# Altium PCB AlarmTiming.PcbDoc
Units mm, origin at the board's own origin, x right, y up, seen from the top; angles counter-clockwise.
Board outline 103.5 x 82.17 mm, 2 copper layers (Top Layer, Bottom Layer); 34 components, 27 nets, 119 pads, 3 vias.
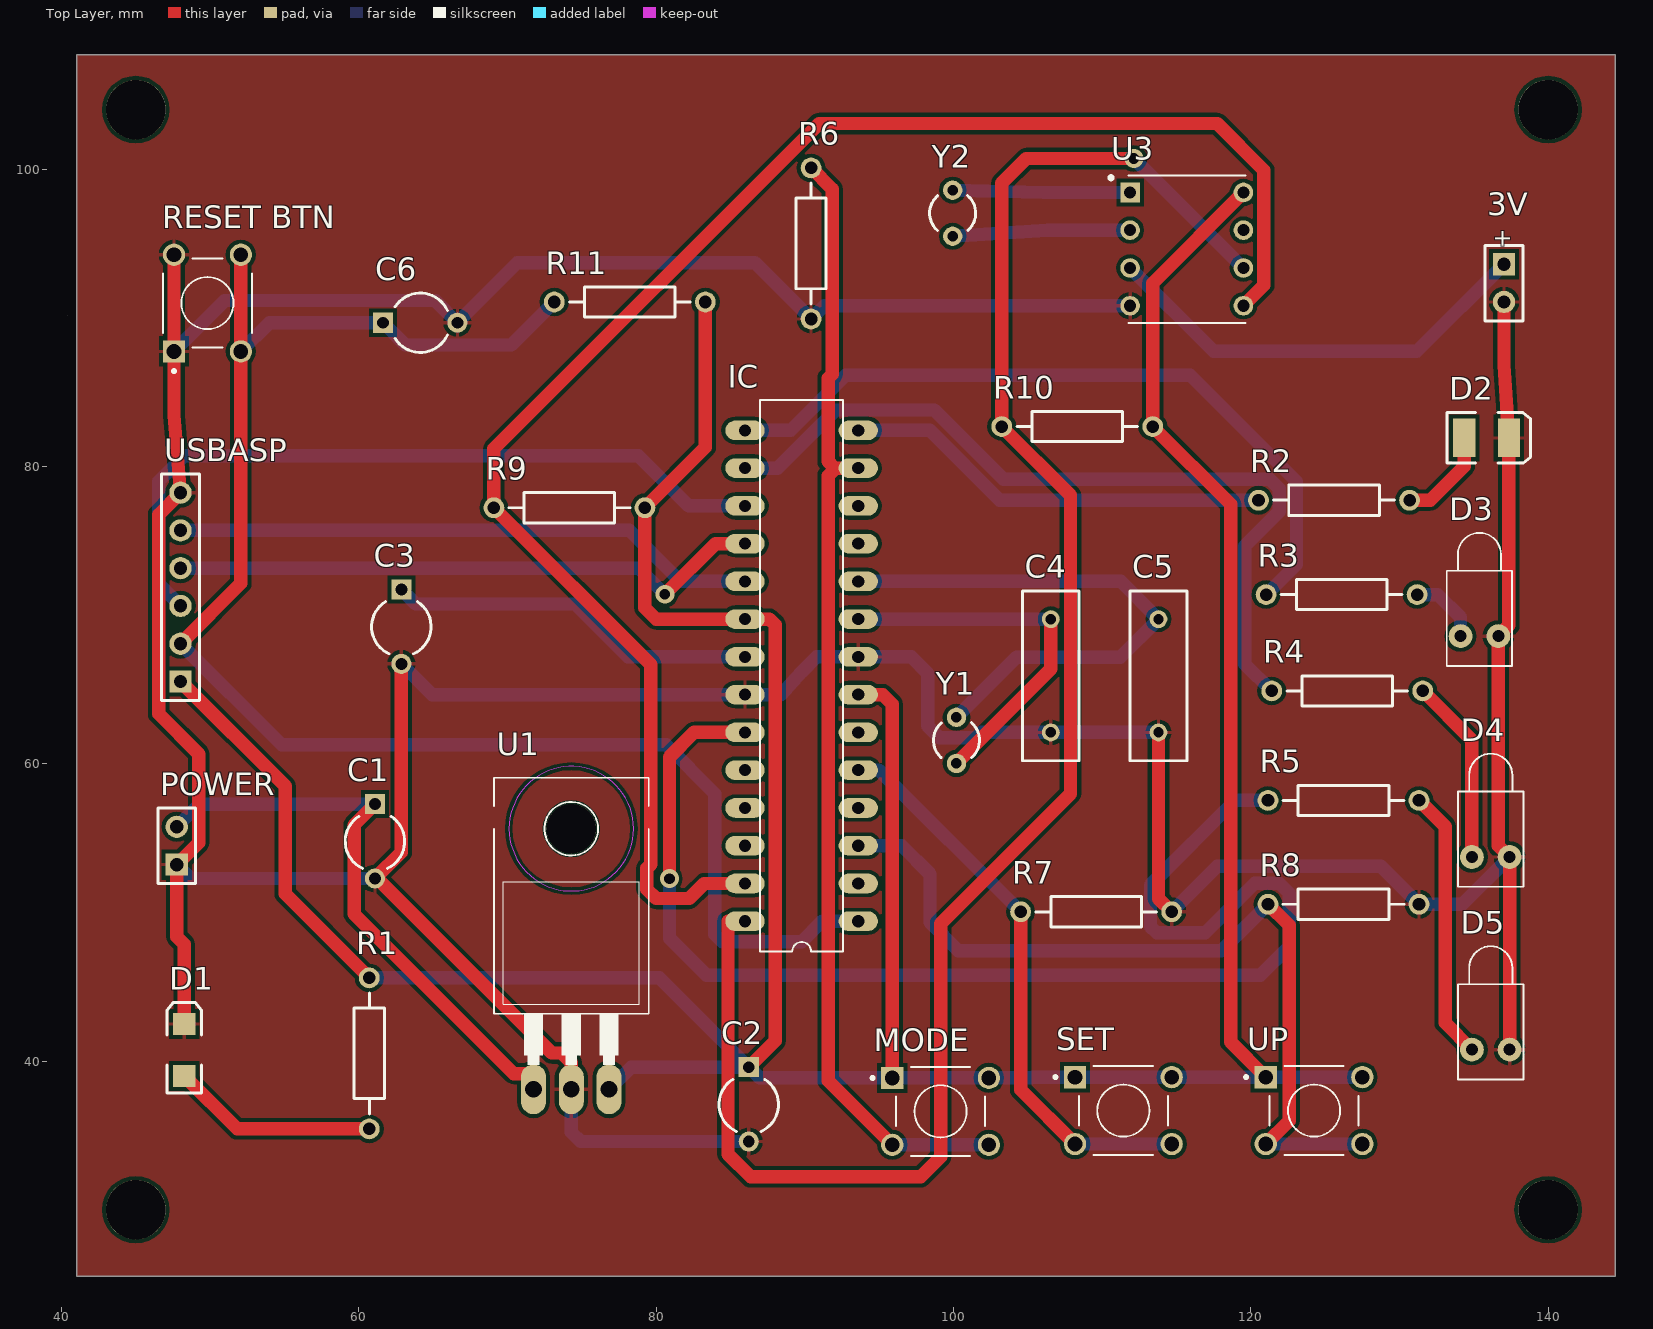
[diagram p0: Top Layer view]
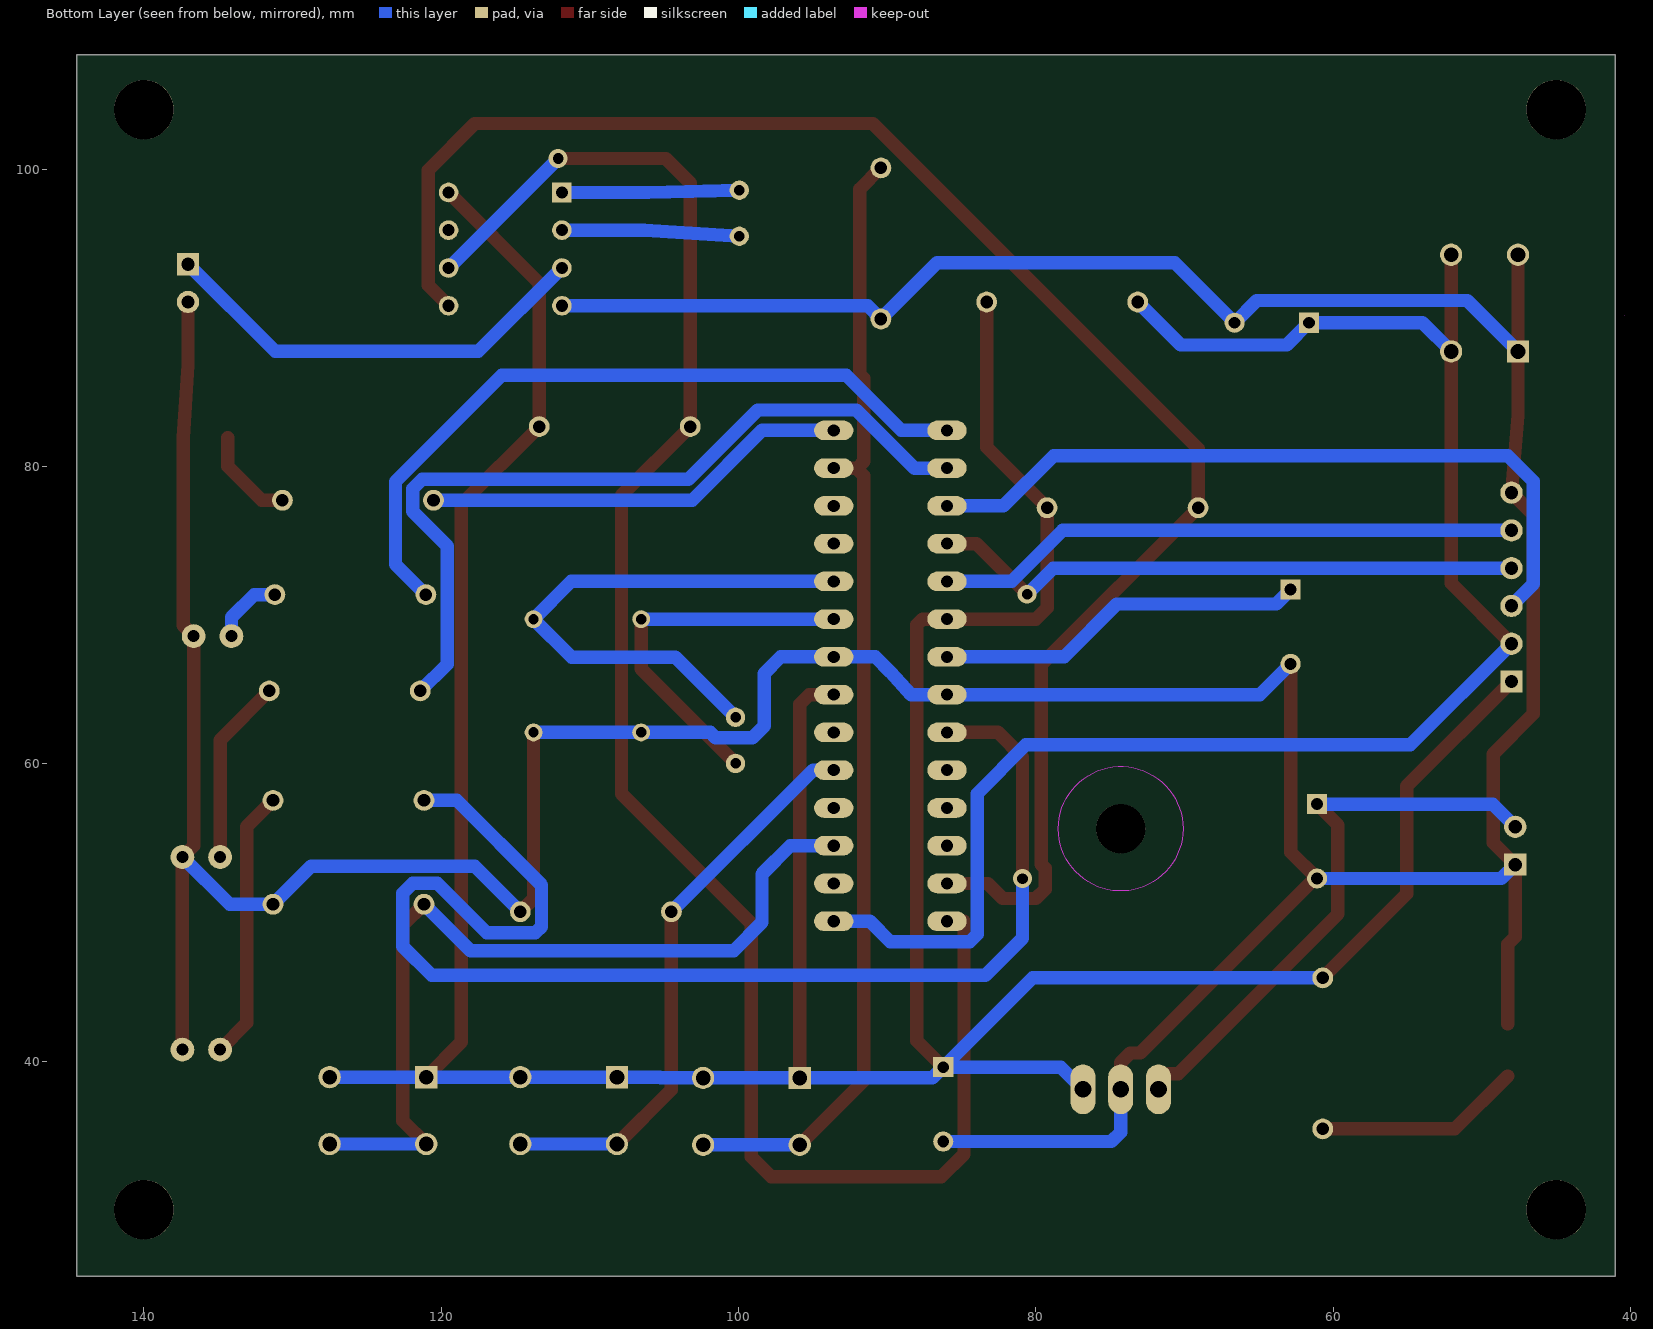
[diagram p1: Bottom Layer view, seen from below]

## Layer stack, top to bottom
Top Solder: solder mask 0.0102, Solder Resist, Dk 3.5
Top Layer: signal copper 0.0356
Dielectric 1: dielectric 0.32, FR-4, Dk 4.8
Bottom Layer: signal copper 0.0356
Bottom Solder: solder mask 0.0102, Solder Resist, Dk 3.5

## Board outline
41.021,25.527 144.526,25.527 144.526,107.696 41.021,107.696
cut-out: 40.386,90.17

## Design rules (kind name [scope] priority, off if disabled: settings)
Clearance "Schematic Clearance Constraint" [All] p1: gap=0.254 ignorepadtopadclearanceinfootprint=FALSE except(0: Arc-Hole Track-Hole SMDPad-Hole THPad-Hole Via-Hole Fill-Hole Poly-Hole Region-Hole Text-Hole)
Clearance [All] p2: gap=0.4 ignorepadtopadclearanceinfootprint=FALSE except(0: Arc-Hole Track-Hole SMDPad-Hole THPad-Hole Via-Hole Fill-Hole Poly-Hole Region-Hole Text-Hole; 0.254: Arc-SMDPad Arc-THPad Arc-Via Arc-Text Track-SMDPad Track-THPad Track-Via Track-Text SMDPad-SMDPad SMDPad-THPad SMDPad-Via SMDPad-Text THPad-THPad THPad-Via THPad-Text Via-Via Via-Text Fill-Text Poly-Text Region-Text Text-Text; 0.6: Arc-Arc Arc-Track Track-Track)
PolygonConnect [All] p1: connectstyle=Relief reliefconductorwidth=0.254 reliefentries=4 polygonreliefangle="90 Angle" airgapwidth=0.254
RoutingVias [All] p1: holewidth=0.711 width=1.27 viastyle="Through Hole" minholewidth=0.711 minwidth=1.27 maxholewidth=0.711 maxwidth=1.27
SilkToSolderMaskClearance [IsPad] p1: minsilkscreentomaskgap=0.127 clearancetoexposedcopper=TRUE
SolderMaskExpansion [All] p1: expansion=0.102
Width [All] p1: maxlimit=1.3 minlimit=0.3 preferedwidth=0.9
29 further rules are at their usual default settings.

## Components (designator, comment, footprint, x,y, rotation, side; value= is the part's Value field where it differs from the comment)
3V "Battery" BAT-2 137.033,92.329 r270 top
C1 "Cap2" CAPR5-4X5 61.087,54.777 r270 top value=330nF
C2 "Cap2" CAPR5-4X5 86.233,37.084 r270 top value=100nF
C3 "Cap2" CAPR5-4X5 62.865,69.215 r270 top value=100nF
C4 "Cap" RAD-0.3 106.553,65.913 r90 top value=22pF
C5 "Cap" RAD-0.3 113.792,65.913 r90 top value=22pF
C6 "Cap2" CAPR5-4X5 64.135,89.662 r0 top value=100nF
D1 "Green LED" 3.2X1.6X1.1 48.26,40.739 r90 top
D2 "BLUE" 3.5X2.8X1.9 135.866,81.915 r0 top
D3 "RED2" LED-1 135.382,68.58 r90 top
D4 "RED1" LED-1 136.144,53.721 r90 top
D5 "RED" LED-1 136.144,40.767 r90 top
IC "ATMEGA328P-PN" DIL28 89.789,65.913 r180 top
MODE "1825910-2" TE_1825910-2 95.885,38.862 r0 top
POWER "Header 2" HDR1X2 47.752,53.213 r90 top
R1 "Res2" AXIAL-0.4 60.706,40.513 r270 top value=220R
R2 "Res2" AXIAL-0.4 125.603,77.724 r0 top value=220R
R3 "Res2" AXIAL-0.4 126.111,71.374 r0 top value=220R
R4 "Res2" AXIAL-0.4 126.492,64.897 r0 top value=220R
R5 "Res2" AXIAL-0.4 126.238,57.531 r0 top value=220R
R6 "Res2" AXIAL-0.4 90.424,94.996 r90 top value=10K
R7 "" AXIAL-0.4 109.601,50.038 r180 top value=10K
R8 "Res2" AXIAL-0.4 126.238,50.546 r180 top value=10K
R9 "Res2" AXIAL-0.4 74.168,77.216 r180 top value=3.3K
R10 "Res2" AXIAL-0.4 108.331,82.677 r180 top value=3.3K
R11 "Res2" AXIAL-0.4 78.232,91.059 r0 top value=10K
"RESET BTN" "1825910-2" TE_1825910-2 47.57,87.734 r90 top
SET "1825910-2" TE_1825910-2 108.181,38.917 r0 top
U1 "LM7805" TO220 74.295,44.45 r0 top
U3 "DS1307N" DIP762W47P254L991H457Q8 115.697,94.615 r0 top
UP "1825910-2" TE_1825910-2 121.008,38.917 r0 top
USBASP "Header 6" HDR1X6 48.006,65.532 r90 top
Y1 "8MHz" R38 100.203,61.569 r180 top
Y2 "8MHz" R38 99.949,97.028 r180 top

## Footprints (in the part's own frame and the unit in brackets; to place one, negate y for a bottom-side part, rotate by r counter-clockwise, add the part's x,y. Pads: shape width x height; smd on the part's side, far side on the other; paste and mask are expansions set on the pad)
3.2X1.6X1.1 [mm] "SMT LED; 2 Flat Leads"
  rect 1.5x1.5 smd: 1(-1.75,0) 2(1.75,0)
  silkscreen extent -2.9,-1.15 3.2,1.15
3.5X2.8X1.9 [mm] "SM LED; 2 C-Bend Leads; Body 3.5 x 2.8 x 1.9 mm, inc leads (LxWxH typ)"
  rect 1.5x2.6 smd: 1(-1.5,0) 2(1.5,0)
  silkscreen extent -2.65,-1.7 2.95,1.7
AXIAL-0.4 [mm] "Axial Device, Thru-Hole; 2 Leads; 0.4 in Pin Spacing"
  round 1.4 hole 0.85: 1(-5.08,0) 2(5.08,0)
  silkscreen extent -4.06,-1.02 4.06,1.02
BAT-2 [mm] "Battery; 2 Leads"
  rect 1.5x1.5 hole 0.9: 1(-1.27,0)
  round 1.5 hole 0.9: 2(1.27,0)
  silkscreen extent -2.54,-1.27 2.54,1.27
CAPR5-4X5 [mm] "Capacitor; 2 Leads"
  rect 1.35x1.35 hole 0.8: 1(-2.5,0)
  round 1.35 hole 0.8: 2(2.5,0)
  silkscreen extent -1.69,-2 1.82,2
DIL28 [mil]
  oval 104x52 hole 32: 1(-150,650) 2(-150,550) 3(-150,450) 4(-150,350) 5(-150,250) 6(-150,150) 7(-150,50) 8(-150,-50) 9(-150,-150) 10(-150,-250) 11(-150,-350) 12(-150,-450) 13(-150,-550) 14(-150,-650) 15(150,-650) 16(150,-550) 17(150,-450) 18(150,-350) 19(150,-250) 20(150,-150) 21(150,-50) 22(150,50) 23(150,150) 24(150,250) 25(150,350) 26(150,450) 27(150,550) 28(150,650)
  silkscreen extent -110,-730 110,730
DIP762W47P254L991H457Q8 [mm]
  rect 1.318x1.318 hole 0.81: 1(-3.81,3.81)
  round 1.318 hole 0.81: 2(-3.81,1.27) 3(-3.81,-1.27) 4(-3.81,-3.81) 5(3.81,-3.81) 6(3.81,-1.27) 7(3.81,1.27) 8(3.81,3.81)
  silkscreen extent -5.22,-4.96 3.94,4.96
HDR1X2 [mm] "Connector; Header; 2 Position"
  rect 1.5x1.5 hole 0.9: 1(0,0)
  round 1.5 hole 0.9: 2(2.54,0)
  silkscreen extent -1.27,-1.27 3.81,1.27
HDR1X6 [mm] "Connector; Header; 6 Position"
  rect 1.5x1.5 hole 0.9: 1(0,0)
  round 1.5 hole 0.9: 2(2.54,0) 3(5.08,0) 4(7.62,0) 5(10.16,0) 6(12.7,0)
  silkscreen extent -1.27,-1.27 13.97,1.27
LED-1 [mm] "LED; 2 Leads"
  round 1.6 hole 0.8: 1(0,1.27) 2(0,-1.27)
  silkscreen extent -2,-2.2 6.95,2.2
R38 [mm] "Crystal, Thru-Hole; 2 Leads; Body 3.1 x 8.2 mm (Dia.xH)"
  round 1.3 hole 0.7: 1(0,1.55) 2(0,-1.55)
  silkscreen extent -1.55,-1.19 1.55,1.17
RAD-0.3 [mm] "Radial Cap, Thru-Hole; 2 Leads; 0.3 in Pin Spacing"
  round 1.2 hole 0.7: 1(-3.81,0) 2(3.81,0)
  silkscreen extent -5.71,-1.91 5.71,1.91
TE_1825910-2 [mm]
  rect 1.498x1.498 hole 0.99: 1(0,0)
  round 1.498 hole 0.99: 2(6.5,0) 3(0,-4.5) 4(6.5,-4.5)
  silkscreen extent -1.42,-5.24 6.24,0.74
TO220 [mil]
  oval 66x132 hole 44: 1(-100,-250) 2(0,-250) 3(100,-250)
  round 130 hole 130 unplated: ""(0,440)
  Keep-Out Layer circle w0: c0,440 r165
  Keep-Out Layer circle w0: c0,440 r165
  silkscreen extent -205,-185 205,575

## Part data
3V: "Multicell Battery", LatestRevisionDate=17-Jul-2002, LatestRevisionNote="Re-released for DXP Platform.", PackageDescription="Battery; 2 Leads", PackageReference=BAT-2, Published=24-Mar-1999, Publisher="Altium Limited"
C1 C2 C3 C4 C5 C6: "Capacitor", Publisher="Altium Limited"
  C1 C2 C3 C6: PackageDescription="Capacitor; 2 Leads", PackageReference=CAPR5-4X5, Published=23-Sep-2002
  C4 C5: LatestRevisionDate=17-Jul-2002, LatestRevisionNote="Re-released for DXP Platform.", PackageDescription="Radial Cap, Thru-Hole; 2 Leads; 0.3 in Pin Spacing", PackageReference=RAD-0.3, Published=8-Jun-2000
D1: library part LED2, "Typical RED, GREEN, YELLOW, AMBER GaAs LED", LatestRevisionDate=17-Jul-2002, LatestRevisionNote="Re-released for DXP Platform.", PackageDescription="SM LED; 2 Flat Leads", PackageReference=3.2X1.6X1.1, PackageVersion=Feb-2002, Published=8-Jun-2000, Publisher="Altium Limited"
D2: library part LED3, "Typical BLUE SiC LED", DatasheetVersion=16-Apr-2002, LatestRevisionDate=17-Dec-2003, LatestRevisionNote="PCB Footprint replaced.", PackageDescription="SM LED; 2 C-Bend Leads; Body 3.5 x 2.8 x 1.9 mm, inc leads (LxWxH typ)", PackageReference=3.5X2.8X1.9, PackageVersion=16-Apr-2002, Published=8-Jun-2000, Publisher="Altium Limited"
D3 D4 D5: library part LED1, "Typical RED GaAs LED", LatestRevisionDate=08-Jul-2005, LatestRevisionNote="Mech Layer 1 removed.", PackageDescription="LED; 2 Leads", PackageReference=LED-1, Published=8-Jun-2000, Publisher="Altium Limited"
IC: "AVR AVR® ATmega Microcontroller IC 8-Bit 20MHz 32KB _16K x 16_ FLASH 28-PDIP", Package="PDIP-28 Atmel", Availability=Unavailable, MF=Microchip, MP=ATMEGA328P-PN, Price=None, SnapEDA_Link=https://www.snapeda.com/parts/ATMEGA328P-PN/Microchip/view-part/396640/?ref=snap
MODE "RESET BTN" SET UP: "50 mA SPST Round Actuator 160 Gram Force Tactile Pushbutton Switch", Contact_Current_Rating="50 mA", Package=None, Availability=Unavailable, Configuration_Pole-Throw="Single Pole - Single Throw", EU_RoHS_Compliance=Compliant, MF="TE Connectivity", MP=1825910-2, Price=None, SnapEDA_Link=https://www.snapeda.com/parts/1825910-2/TE%20Connectivity%20ALCOSWITCH%20Switches/view-part/278983/?ref=snap, TE_purchase_URL=https://www.te.com/usa-en/product-1825910-2.html?te_bu=Cor&te_type=disp&te_campaign=seda_glo_cor-seda-global-disp-prtnr-fy19-seda-model-bom-cta_sma-317_1&elqCampaignId=32493
POWER: "Header, 2-Pin", LatestRevisionDate=17-Jul-2002, LatestRevisionNote="Re-released for DXP Platform.", Publisher="Altium Limited"
R1 R2 R3 R4 R5 R6 R8 R9 R10 R11: "Resistor", LatestRevisionDate=17-Jul-2002, LatestRevisionNote="Re-released for DXP Platform.", PackageDescription="Axial Device, Thru-Hole; 2 Leads; 0.4 in Pin Spacing", PackageReference=AXIAL-0.4, Published=8-Jun-2000, Publisher="Altium Limited"
R7: library part Res2, "Resistor", LatestRevisionDate=17-Jul-2002, LatestRevisionNote="Re-released for DXP Platform.", PackageDescription="Axial Device, Thru-Hole; 2 Leads; 0.4 in Pin Spacing", PackageReference=AXIAL-0.4, Published=8-Jun-2000, Publisher="Altium Limited"
U1: "Linear Voltage Regulator IC 1 Output 1.5A SOT-223-4", Package="TO-220 Texas Instruments", Availability=Unavailable, MF="Texas Instruments", MP=LM7805, Price=None, SnapEDA_Link=https://www.snapeda.com/parts/LM7805/Texas%20Instruments/view-part/2302466/?ref=snap
U3: "Real Time Clock _RTC_ IC Clock/Calendar 56B I²C, 2-Wire Serial 8-DIP _0.300, 7.62mm_", Package="DIP-8 Maxim Integrated", Availability=Unavailable, MF="Maxim Integrated", MP=DS1307N, Price=None, SnapEDA_Link=https://www.snapeda.com/parts/DS1307N/Maxim%20Integrated/view-part/9754/?ref=snap
USBASP: "Header, 6-Pin", LatestRevisionDate=17-Jul-2002, LatestRevisionNote="Re-released for DXP Platform.", Publisher="Altium Limited"
Y1 Y2: library part XTAL, "Crystal Oscillator", LatestRevisionDate=17-Jul-2002, LatestRevisionNote="Re-released for DXP Platform.", PackageDescription="Crystal, Thru-Hole; 2 Leads; Body 3.1 x 8.2 mm (Dia.xH)", PackageReference=R38, Published=8-Jun-2000, Publisher="Altium Limited"

## Free pads (board coordinates)
  round 4 hole 4 unplated: 28(-40.005,172.974) 28(45,30) 28(45,104) 28(140,30) 28(140,104)

## Via types
v1: diameter 1.27, hole 0.711, Top Layer to Bottom Layer, 3 vias

## Nets (pads, with @x,y where several pads share a name; then routed paths per layer and width w, separated by ;. In a path a pad name is that pad's centre, name@x,y a point inside that pad or via, vN(x,y) a via of type N, cw(c..) or ccw(c..) an arc to the next point about the centre after c; other vN are vias at no path point)
BLUE: IC.14 R2.1 | length 28.9
  Bottom Layer w0.9: IC.14 98.425,82.423 103.124,77.724 R2.1
DATA: IC.3 R8.2 UP.3 UP.4 | length 57.6
  Top Layer w0.9: UP.3 122.58,35.989 122.58,49.124 R8.2
  Bottom Layer w0.9: IC.3 96.52,54.483 98.425,52.578 98.425,49.327 100.33,47.422 118.034,47.422 R8.2 ; UP.3 UP.4
GND: 3V.2 "RESET BTN.1" "RESET BTN.2" C1.2 C2.2 C3.2 C4.1 C5.1 C6.2 D1.2 D2.2 D3.2 D4.2 D5.2 IC.8 IC.22 POWER.1 R6.1 R7.1 R8.1 U1.2 U3.4 USBASP.6 | length 335.4
  Top Layer w0.9: 47.57,94.234 47.57,87.734 47.57,83.418 USBASP.6 46.533,76.759 46.533,63.348 49.225,60.655 49.225,54.686 POWER.1 47.752,48.362 48.26,47.854 D1.2 ; C1.2 C1.2@61.159,52.349 ; C3.2 62.865,54.055 C1.2@61.159,52.349 ; U1.2 74.295,39.903 73.66,40.538 72.97,40.538 C1.2@61.159,52.349 ; C5.1 113.792,50.927 R7.1 ; 3V.2 137.033,86.82 D2.2 137.366,69.294 D3.2 136.652,54.483 D4.2 D5.2
  Bottom Layer w0.9: 47.57,87.734 50.997,91.161 65.136,91.161 C6.2 70.659,93.686 86.654,93.686 R6.1 91.313,90.805 U3.4 ; POWER.1 48.688,52.277 C1.2 ; C3.2 64.937,64.643 IC.22 88.392,64.643 89.789,66.167 90.805,67.183 IC.8 97.155,67.183 98.273,66.065 98.273,62.535 99.06,61.747 101.549,61.747 101.905,62.103 C4.1 C5.1 ; U1.2 74.295,35.219 74.93,34.584 C2.2 ; R7.1 117.747,53.104 128.76,53.104 R8.1 134.239,50.546 D4.2
MISO: IC.18 USBASP.4 | length 40.1
  Top Layer w0.9: v1(80.594,71.399) 83.998,74.803 IC.18
  Bottom Layer w0.9: USBASP.4 78.842,73.152 v1(80.594,71.399)
MODE: IC.13 MODE.3 MODE.4 R6.2 | length 76.7
  Top Layer w0.9: R6.2 91.846,98.654 91.846,86.208 91.567,85.928 91.567,80.328 92.011,79.883 92.075,79.883 ; IC.13 92.075,79.883 ; MODE.3 91.567,38.68 91.567,79.375 92.075,79.883
  Bottom Layer w0.9: MODE.3 MODE.4
MOSI: IC.17 USBASP.3 | length 50.6
  Bottom Layer w0.9: USBASP.3 46.533,72.085 46.533,78.994 48.26,80.721 78.798,80.721 82.176,77.343 IC.17
Net3V_1: 3V.1 U3.3 | length 29.9
  Bottom Layer w0.9: U3.3 117.5,87.732 131.166,87.732 3V.1
NetC1_1: C1.1 POWER.2 U1.1 | length 39.5
  Top Layer w0.9: C1.1 59.69,55.88 59.69,49.886 70.434,39.141 71.755,39.141 U1.1
  Bottom Layer w0.9: POWER.2 49.276,57.277 C1.1
NetC2_1: C2.1 IC.7 IC.20 MODE.1 MODE.2 R1.1 R9.1 R10.1 R11.2 SET.1 SET.2 U1.3 U3.8 UP.1 UP.2 USBASP.1 | length 259.7
  Top Layer w0.9: USBASP.1 55.042,58.496 55.042,51.257 R1.1 ; R11.2 83.312,81.28 R9.1 79.248,70.485 80.01,69.723 IC.20 87.63,69.723 88.011,69.342 88.011,41.362 C2.1 ; IC.7 95.25,64.643 95.885,64.008 MODE.1 ; U3.8 113.411,92.329 R10.1 118.643,77.445 118.643,41.282 UP.1
  Bottom Layer w0.9: R1.1 80.224,45.593 C2.1 ; U1.3 78.319,39.584 C2.1 ; UP.2 UP.1 SET.2 SET.1 105.287,38.917 105.232,38.862 MODE.2 MODE.1 86.955,38.862 C2.1
NetC3_1: C3.1 IC.21 | length 25
  Bottom Layer w0.9: C3.1 63.841,70.739 74.549,70.739 78.105,67.183 IC.21
NetC4_2: C4.2 IC.9 Y1.1 | length 25.3
  Top Layer w0.9: Y1.1 106.553,66.369 C4.2
  Bottom Layer w0.9: IC.9 C4.2
NetC5_2: C5.2 IC.10 Y1.2 | length 37.6
  Bottom Layer w0.9: IC.10 111.252,72.263 C5.2 111.227,67.158 104.242,67.158 Y1.2
NetD1_1: D1.1 R1.2 | length 13.9
  Top Layer w0.9: D1.1 51.816,35.433 R1.2
NetD2_1: D2.1 R2.2 | length 6.5
  Top Layer w0.9: R2.2 132.08,77.724 134.366,80.01 D2.1
NetD3_1: D3.1 R3.2 | length 4.8
  Bottom Layer w0.9: R3.2 132.588,71.374 134.112,69.85 D3.1
NetD4_1: D4.1 R4.2 | length 12.5
  Top Layer w0.9: R4.2 134.874,61.595 D4.1
NetD5_1: D5.1 R5.2 | length 18.2
  Top Layer w0.9: R5.2 133.071,55.778 133.071,42.57 D5.1
NetIC_27: IC.27 R9.2 U3.5 | length 113.2
  Top Layer w0.9: IC.27 83.231,51.943 82.22,50.932 80.01,50.932 79.375,51.567 79.375,52.961 79.629,53.215 79.629,66.675 R9.2 69.088,81.178 90.976,103.066 117.736,103.066 120.879,99.924 120.879,92.177 U3.5
NetIC_28: IC.28 R10.2 U3.6 | length 123.3
  Top Layer w0.9: IC.28 84.836,49.403 84.836,33.731 86.36,32.207 97.79,32.207 99.136,33.553 99.136,49.251 107.874,57.988 107.874,78.054 R10.2 103.251,99.06 104.902,100.711 v1(112.141,100.711)
  Bottom Layer w0.9: v1(112.141,100.711) U3.6
NetU3_1: U3.1 Y2.2 | length 11.9
  Bottom Layer w0.9: Y2.2 106.071,98.425 U3.1
NetU3_2: U3.2 Y2.1 | length 12
  Bottom Layer w0.9: Y2.1 106.325,95.885 U3.2
RED: IC.23 R5.1 | length 89.3
  Top Layer w0.9: v1(80.899,52.273) 80.899,60.452 82.55,62.103 IC.23
  Bottom Layer w0.9: v1(80.899,52.273) 80.899,48.26 83.388,45.771 120.65,45.771 122.58,47.701 122.58,51.29 121.92,51.95 120.269,51.95 116.935,48.616 113.665,48.616 113.259,49.022 113.259,51.841 118.948,57.531 R5.1
RED1: IC.16 R4.1 | length 55.1
  Bottom Layer w0.9: IC.16 88.163,79.883 92.075,83.795 98.704,83.795 103.371,79.128 121.285,79.128 121.927,78.486 121.927,76.962 119.609,74.644 119.609,66.7 R4.1
RED2: IC.15 R3.1 | length 50.1
  Bottom Layer w0.9: IC.15 89.052,82.423 92.761,86.131 115.926,86.131 123.081,78.976 123.081,73.424 R3.1
RESET: "RESET BTN.3" "RESET BTN.4" C6.1 IC.1 R11.1 USBASP.2 | length 111.5
  Top Layer w0.9: USBASP.2 52.07,72.136 52.07,87.734 52.07,94.234
  Bottom Layer w0.9: USBASP.2 54.813,61.265 80.67,61.265 83.947,57.988 83.947,48.539 84.455,48.031 89.789,48.031 91.161,49.403 IC.1 ; 52.07,87.734 53.998,89.662 C6.1 63.134,88.163 70.256,88.163 R11.1
SCk: IC.19 USBASP.5 | length 39.4
  Bottom Layer w0.9: USBASP.5 78.207,75.692 81.636,72.263 IC.19
SET: IC.5 R7.2 SET.3 SET.4 | length 38.5
  Top Layer w0.9: R7.2 104.521,38.077 SET.3
  Bottom Layer w0.9: IC.5 94.996,59.563 R7.2 ; SET.3 SET.4
pads on no net: IC.2 IC.4 IC.6 IC.11 IC.12 IC.24 IC.25 IC.26 U1. U3.7

## Polygon pours and split planes (outlines as drawn)
no net on Top Solder (solid): 33.147,123.571
no net on Top Layer (solid, pour order 16): 40.767,107.95
GND on Top Layer (solid, pour order 14): 144.526,107.696 144.526,25.527 41.021,25.527 41.021,107.696
no net on Top Layer (solid, pour order 8): 40.767,107.696
no net on Top Layer (solid, pour order 4): 35.56,99.568

## Text inside footprints (layer, text, board x,y; h text height)
3V: Top Overlay "+" at 136.456,95.999 h1.15 r270
U1: Mechanical 13 "3" at 76.2,44.45 h1.27; Mechanical 13 "2" at 73.659,44.45 h1.27; Mechanical 13 "1" at 71.114,44.45 h1.27